# Altium PCB PCB_SEPIC-MT3608_2025-10-18.pcbdoc
Units mm, origin at the board's own origin, x right, y up, seen from the top; angles counter-clockwise.
Board outline 111.4 x 64.16 mm, 2 copper layers (Top Layer, Bottom Layer); 32 components, 11 nets, 62 pads, 7 vias.
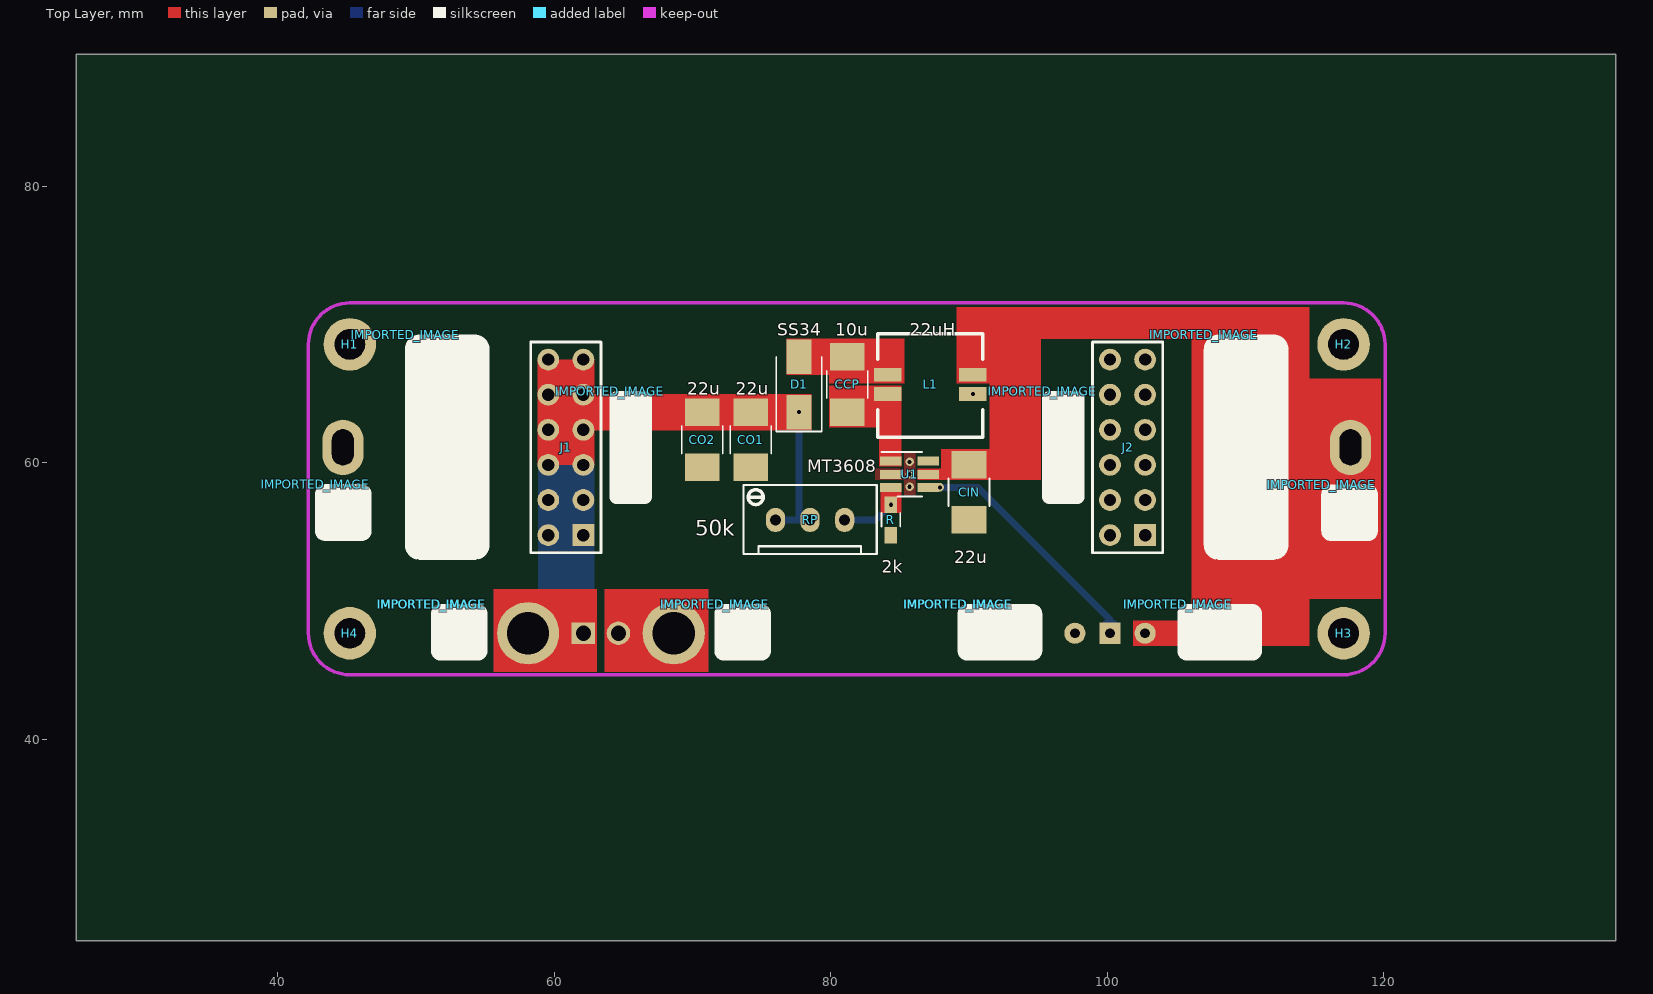
[diagram p0: Top Layer view]
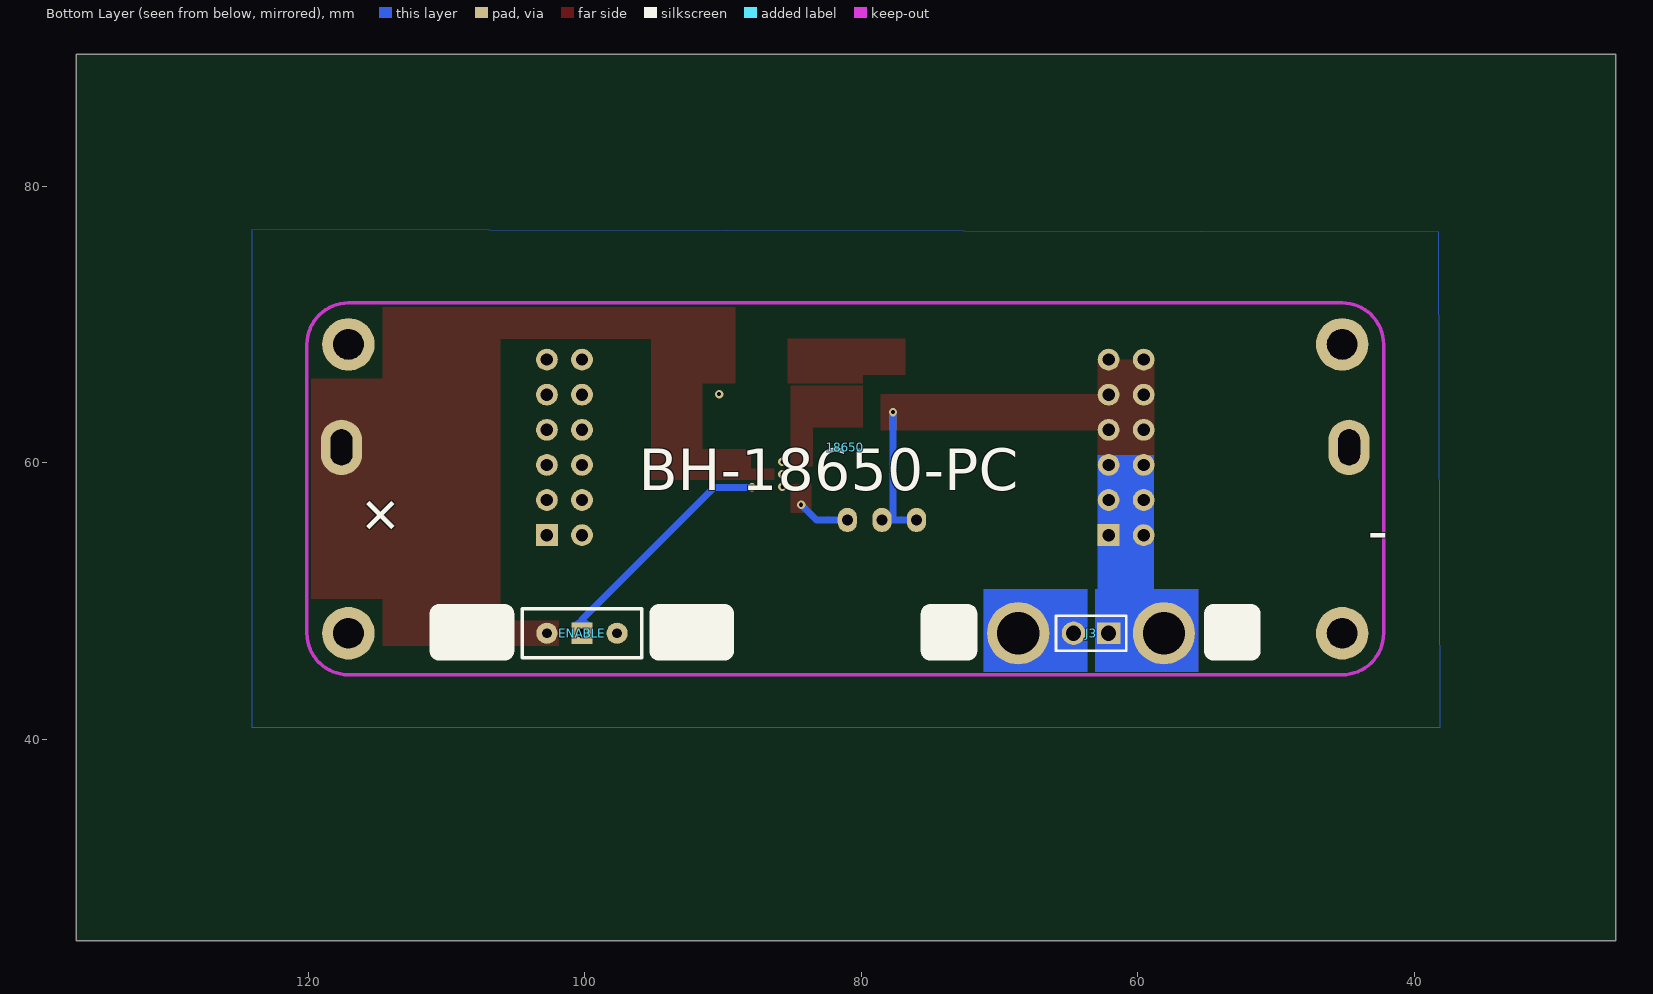
[diagram p1: Bottom Layer view, seen from below]

## Layer stack, top to bottom
Top Layer: signal copper (thickness not stored)
Dielectric: dielectric 0.32, FR-4, Dk 4.8
Bottom Layer: signal copper (thickness not stored)

## Board outline
136.8,25.4 25.4,25.4 25.4,89.561 136.8,89.561

## Components (designator, comment, footprint, x,y, rotation, side; value= is the part's Value field where it differs from the comment)
18650 "BH-18650-PC" BH-18650-PC-NO-SILK 81.15,61.111 r180 bottom
CCP "10u" C_1210_HANDSOLDERING 81.2,65.661 r90 top
CIN "22u" C_1210_HANDSOLDERING 90,57.861 r270 top
CO1 "22u" C_1210_HANDSOLDERING 74.2,61.661 r270 top
CO2 "22u" C_1210_HANDSOLDERING 70.7,61.661 r270 top
D1 "SS34" D_SMA 77.7,65.661 r90 top
ENABLE "SS12D00G3" SLIDE_MINI_SWITCH 100.2,47.661 r270 bottom
H1 "Mounting Hole M2" MOUNTINGHOLE_2.2MM_M2_ISO14580_PAD 45.2,68.561 r0 top
H2 "Mounting Hole M2" MOUNTINGHOLE_2.2MM_M2_ISO14580_PAD 117.1,68.561 r0 top
H3 "Mounting Hole M2" MOUNTINGHOLE_2.2MM_M2_ISO14580_PAD 117.1,47.661 r0 top
H4 "Mounting Hole M2" MOUNTINGHOLE_2.2MM_M2_ISO14580_PAD 45.2,47.661 r0 top
IMPORTED_IMAGE "IMPORTED_IMAGE" IMPORTED_IMAGE 107,69.25 r0 top
IMPORTED_IMAGE "IMPORTED_IMAGE" IMPORTED_IMAGE 95.3,65.155 r0 top
IMPORTED_IMAGE "IMPORTED_IMAGE" IMPORTED_IMAGE 64,65.155 r0 top
IMPORTED_IMAGE "IMPORTED_IMAGE" IMPORTED_IMAGE 49.2,69.25 r0 top
IMPORTED_IMAGE "IMPORTED_IMAGE" IMPORTED_IMAGE 89.189,49.761 r0 top
IMPORTED_IMAGE "IMPORTED_IMAGE" IMPORTED_IMAGE 105.089,49.761 r0 top
IMPORTED_IMAGE "IMPORTED_IMAGE" IMPORTED_IMAGE 51.089,49.761 r0 top
IMPORTED_IMAGE "IMPORTED_IMAGE" IMPORTED_IMAGE 71.589,49.761 r0 top
IMPORTED_IMAGE "IMPORTED_IMAGE" IMPORTED_IMAGE 42.7,58.425 r0 top
IMPORTED_IMAGE "IMPORTED_IMAGE" IMPORTED_IMAGE 115.5,58.414 r0 top
IMPORTED_IMAGE "IMPORTED_IMAGE" IMPORTED_IMAGE 105.115,49.761 r0 top
IMPORTED_IMAGE "IMPORTED_IMAGE" IMPORTED_IMAGE 89.215,49.761 r0 top
IMPORTED_IMAGE "IMPORTED_IMAGE" IMPORTED_IMAGE 71.615,49.761 r0 top
IMPORTED_IMAGE "IMPORTED_IMAGE" IMPORTED_IMAGE 51.115,49.761 r0 top
J1 "2x6" HDR-M-2.54_2X6 60.83,61.111 r90 top
J2 "2x6" HDR-M-2.54_2X6 101.47,61.111 r90 top
J3 "1x2" HDR-M-2.54_1X2 63.37,47.661 r180 bottom
L1 "22uH" FILTER-SMD_4P-L7.6-W7.6-TL 87.2,65.661 r0 top
R "2k" R_0603_HANDSOLDERING 84.35,55.861 r90 top
RP "50k" RES-ADJ-TH_3296W-1-203 78.5,55.861 r180 top
U1 "MT3608" SOT-23-6_HANDSOLDERING 85.7,59.161 r0 top

## Footprints (in the part's own frame and the unit in brackets; to place one, negate y for a bottom-side part, rotate by r counter-clockwise, add the part's x,y. Pads: shape width x height; smd on the part's side, far side on the other; paste and mask are expansions set on the pad)
BH-18650-PC-NO-SILK [mm]
  oval 2.98x4 hole 1.58 slot 2.6 at 90 deg paste+0 mask+0.204: 1(-36.45,0) 2(36.45,0)
C_1210_HANDSOLDERING [mm]
  rect 2x2.5 smd paste+0 mask+0.102: 1(-2,0) 2(2,0)
  silkscreen extent -1,-1.48 1,1.48
D_SMA [mm]
  rect 2.5x1.8 smd paste+0 mask+0.051: 1(-2,0) 2(2,0)
  silkscreen extent -3.4,-1.65 2,1.65
FILTER-SMD_4P-L7.6-W7.6-TL [mm]
  rect 2x1 smd paste+0 mask+0.05: 1(-3.078,0.7) 2(-3.078,-0.7) 3(3.079,-0.7) 4(3.079,0.7)
  silkscreen extent -3.81,-3.81 3.81,3.68
HDR-M-2.54_1X2 [mm]
  rect 1.7x1.575 hole 1.1 paste+0 mask+0.051: 1(1.27,0)
  round 1.7 hole 1.1 paste+0 mask+0.051: 2(-1.27,0)
  silkscreen extent -2.54,-1.27 2.54,1.27
HDR-M-2.54_2X6 [mil]
  rect 62x62 hole 35 paste+0 mask+2: 1(-250,-50)
  round 62 hole 35 paste+0 mask+2: 2(-250,50) 3(-150,-50) 4(-150,50) 5(-50,-50) 6(-50,50) 7(50,-50) 8(50,50) 9(150,-50) 10(150,50) 11(250,-50) 12(250,50)
  silkscreen extent -300,-100 300,100
IMPORTED_IMAGE [mm]
  silkscreen extent 0,-16.26 6.1,0
MOUNTINGHOLE_2.2MM_M2_ISO14580_PAD [mm]
  round 3.8 hole 2.2 slot 2.205 at 0 deg paste+0 mask+0.102: 1(0,0)
R_0603_HANDSOLDERING [mm]
  rect 1.2x0.9 smd paste+0 mask+0.102: 1(-1.1,0) 2(1.1,0)
  silkscreen extent -0.5,-0.68 0.5,0.68
RES-ADJ-TH_3296W-1-203 [mm]
  oval 1.4x1.75 hole 0.8 paste+0 mask+0.051: 1(-2.5,0) 2(0,0) 3(2.5,0)
  silkscreen extent -4.83,-2.53 4.83,2.48
SLIDE_MINI_SWITCH [mil]
  round 60 hole 27.99 paste+0 mask+2: 1(0,-100) 3(0,100)
  rect 60x60 hole 27.99 paste+0 mask+4: 2(0,0)
  silkscreen extent -70,-170 70,170
SOT-23-6_HANDSOLDERING [mm]
  rect 1.56x0.65 smd paste+0 mask+0.102: 1(-1.35,0.95) 2(-1.35,0) 3(-1.35,-0.95) 4(1.35,-0.95) 5(1.35,0) 6(1.35,0.95)
  silkscreen extent -2.05,-1.61 0.9,1.61

## Free pads (board coordinates)
  round 4.5 hole 3.05 paste+0 mask+0.051: 1(58.1,47.661) 1(68.64,47.661)

## Via types
v1: diameter 0.61, hole 0.305, Top Layer to Bottom Layer, tented both sides, 7 vias

## Nets (pads, with @x,y where several pads share a name; then routed paths per layer and width w, separated by ;. In a path a pad name is that pad's centre, name@x,y a point inside that pad or via, vN(x,y) a via of type N, cw(c..) or ccw(c..) an arc to the next point about the centre after c; other vN are vias at no path point)
D1_2: CCP.2 D1.2 L1.1
GND: 18650.2 CIN.2 CO1.2 CO2.2 ENABLE.3 H1.1 H2.1 H3.1 H4.1 J2.1 J2.2 J2.3 J2.4 J2.5 J2.6 J2.7 J2.8 J2.9 J2.10 J2.11 J2.12 J3.2 L1.3 pad.1@68.64,47.661 R.1 U1.2
  other v1: 85.7,58.261 85.7,59.161 85.7,60.061 90.279,64.961
S$26: 
S$28: 
S$30: 
S$32: 
U1_1: CCP.1 L1.2 U1.1
U1_3: R.2 RP.1 U1.3 | length 3.8
  Bottom Layer w0.5: RP.1 83.249,55.86 v1@84.349,56.96
  other v1: 84.35,56.961
U1_4: ENABLE.2 U1.4 | length 17.3
  Bottom Layer w0.5: v1@87.9,58.21 90.65,58.21 100.201,48.662 ENABLE.2
  other v1: 87.9,58.211
VIN: 18650.1 CIN.1 ENABLE.1 L1.4 U1.5
VOUT: CO1.1 CO2.1 D1.1 J1.1 J1.2 J1.3 J1.4 J1.5 J1.6 J1.7 J1.8 J1.9 J1.10 J1.11 J1.12 J3.1 pad.1@58.1,47.661 RP.2 RP.3 | length 10.3
  Bottom Layer w0.5: RP.3 RP.2@78.499,55.86 ; 77.699,55.86 v1@77.699,63.661
  other v1: 77.7,63.661
pads on no net: U1.6

## Polygon pours and split planes (outlines as drawn)
GND on Top Layer (solid): 39.8,74.561 121.9,74.561 122,42.561 39.8,42.561
GND on Bottom Layer (solid): 38.2,76.661 124.1,76.861 124.1,40.861 38.1,40.861

## Keep-outs
Keep-Out Layer:
  lines w0.254: 42.2,47.661 ccw(c45.2,47.661) 45.2,44.661 ; 42.2,68.561 cw(c45.2,68.561) 45.2,71.561 ; 117.1,44.661 ccw(c117.1,47.661) 120.1,47.661 ; 117.1,71.561 cw(c117.1,68.561) 120.1,68.561

## Other copper
Top Layer:
  region net VOUT: 78.6,62.361 62.9,62.361 62.9,59.861 58.8,59.861 58.8,67.461 62.9,67.461 62.9,64.961 75.5,64.961 78.6,64.961
  region net VIN: 95.2,58.761 86.3,58.761 86.3,59.561 88,59.561 88,60.961 91.5,60.961 91.5,65.761 89.1,65.761 89.1,71.261 114.6,71.261 114.6,66.061 119.8,66.061 119.8,50.161 114.6,50.161 114.6,46.761 101.9,46.761 101.9,48.561 106.1,48.561 106.1,68.961 95.2,68.961
  region net U1_1: 83.5,59.761 83.5,62.561 79.9,62.561 79.9,65.561 85.1,65.561 85.1,59.761
  region net D1_2: 85.3,65.761 85.3,68.961 76.8,68.961 76.8,66.361 79.9,66.361 79.9,65.761
  rectangle net GND: 63.64,44.861 71.14,50.861
  rectangle net VOUT: 55.6,44.861 63.1,50.861
  rectangle net U1_3: 83.6,56.361 85.1,58.461
Bottom Layer:
  region net VOUT: 76.7,56.036 76.7,55.686 77.45,55.611 77.45,56.111
  region net VOUT: 77.8,55.686 77.8,56.036 77.05,56.111 77.05,55.611
  region net U1_3: 81.7,56.036 81.7,55.686 82.45,55.611 82.45,56.111
  region net U1_4: 100.826,48.423 99.576,48.423 99.951,48.662 100.451,48.662
  region net U1_3: 84.369,56.657 84.046,56.98 83.88,56.844 84.233,56.491
  region net VOUT: 77.929,63.459 77.471,63.459 77.45,63.246 77.95,63.246
  region net U1_4: 88.102,58.439 88.101,57.982 88.315,57.961 88.315,58.461
  rectangle net VOUT: 55.6,44.861 63.1,50.861
  rectangle net GND: 63.64,44.861 71.14,50.861
  rectangle net VOUT: 58.8,50.261 62.9,60.561

## Silkscreen, mask and mechanical layers (free items; w line width, h text height)
Top Solder:
  rectangle net VOUT: 55.549,44.81 63.151,50.912
  rectangle net GND: 63.589,44.81 71.191,50.912
Bottom Solder:
  rectangle net VOUT: 55.549,44.81 63.151,50.912
  rectangle net GND: 63.589,44.81 71.191,50.912

## Text inside footprints (layer, text, board x,y; h text height)
18650: Bottom Overlay "+" at 115.089,54.05 h3 r315; Bottom Overlay "-" at 43.35,53.611 h3
CCP: Document "REF" at 79.45,64.461 h1 r90
CIN: Document "REF" at 91.75,59.061 h1 r270
CO1: Document "REF" at 75.95,62.861 h1 r270
CO2: Document "REF" at 72.45,62.861 h1 r270
D1: Document "REF" at 75.7,64.461 h1 r90
R: Document "REF" at 83.4,54.661 h1 r90